# Altium PCB khoinguon.PcbDoc
Units mil, origin at the board's own origin, x right, y up, seen from the top; angles counter-clockwise.
Board outline 2640 x 1106.46 mil, 2 copper layers (Top Layer, Bottom Layer); 12 components, 6 nets, 29 pads, 0 vias.
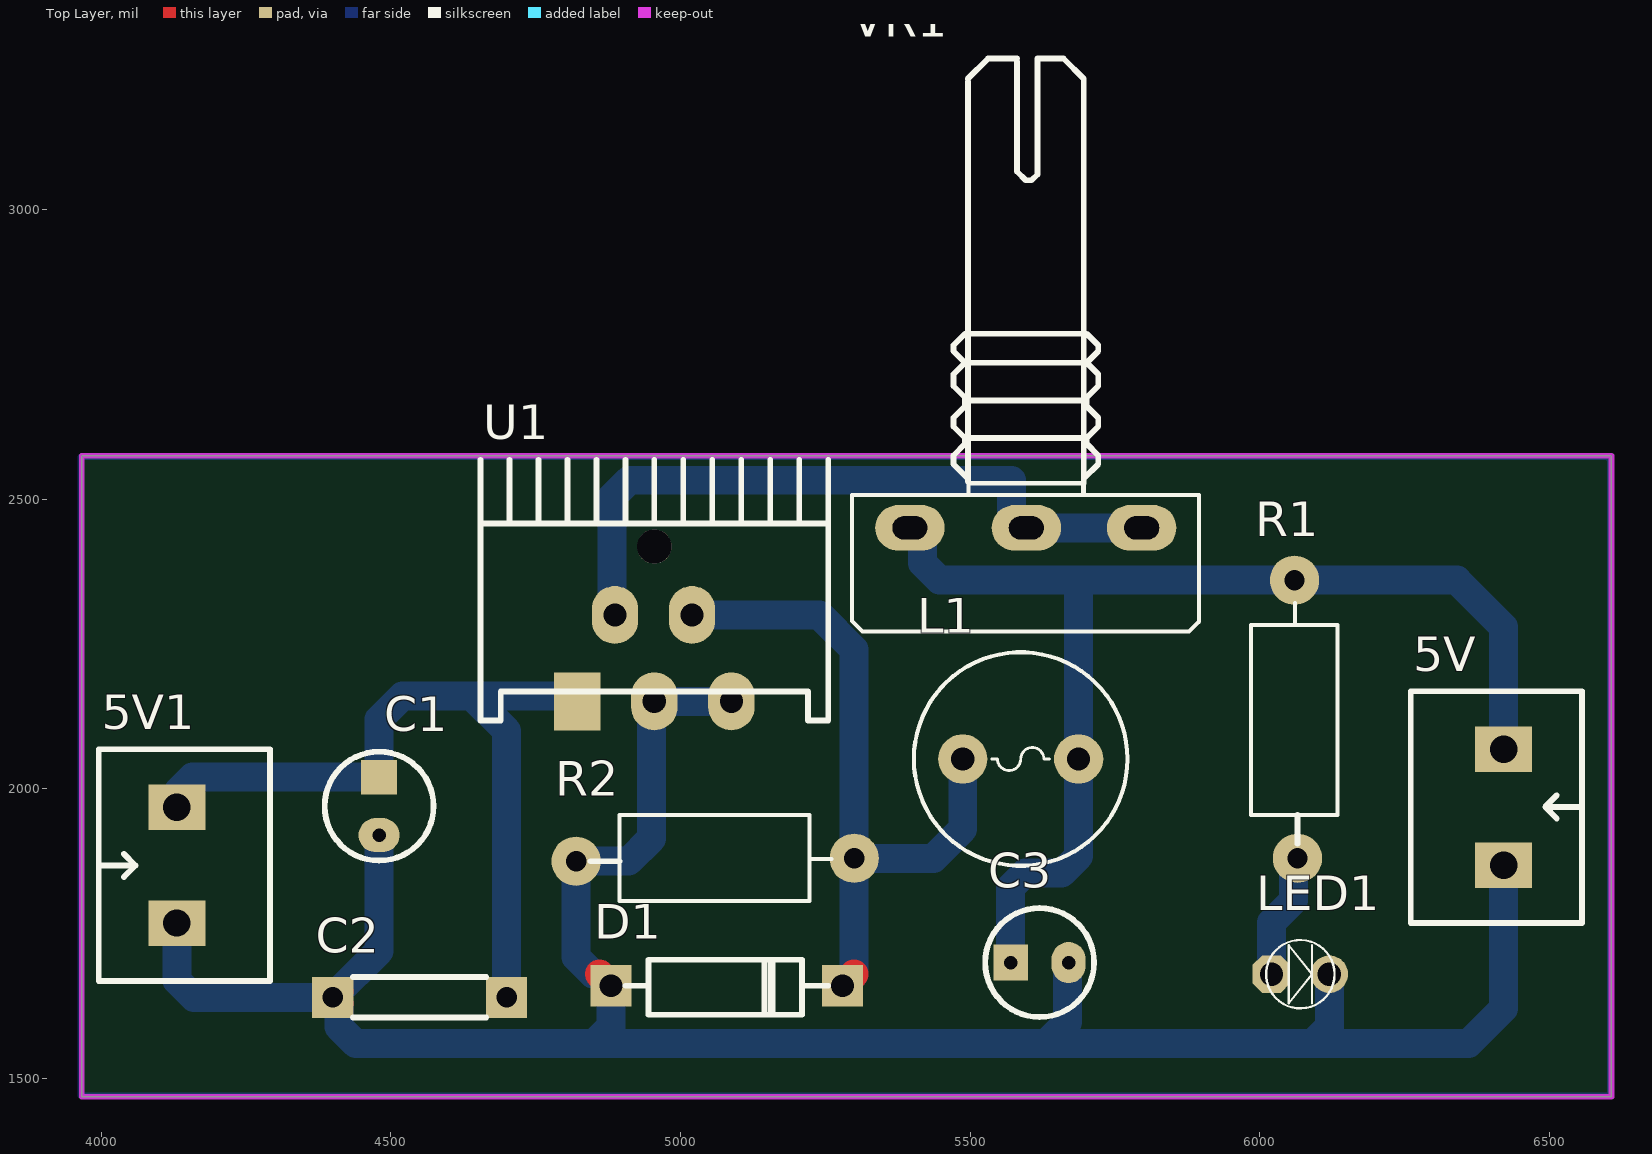
[diagram p0: Top Layer view]
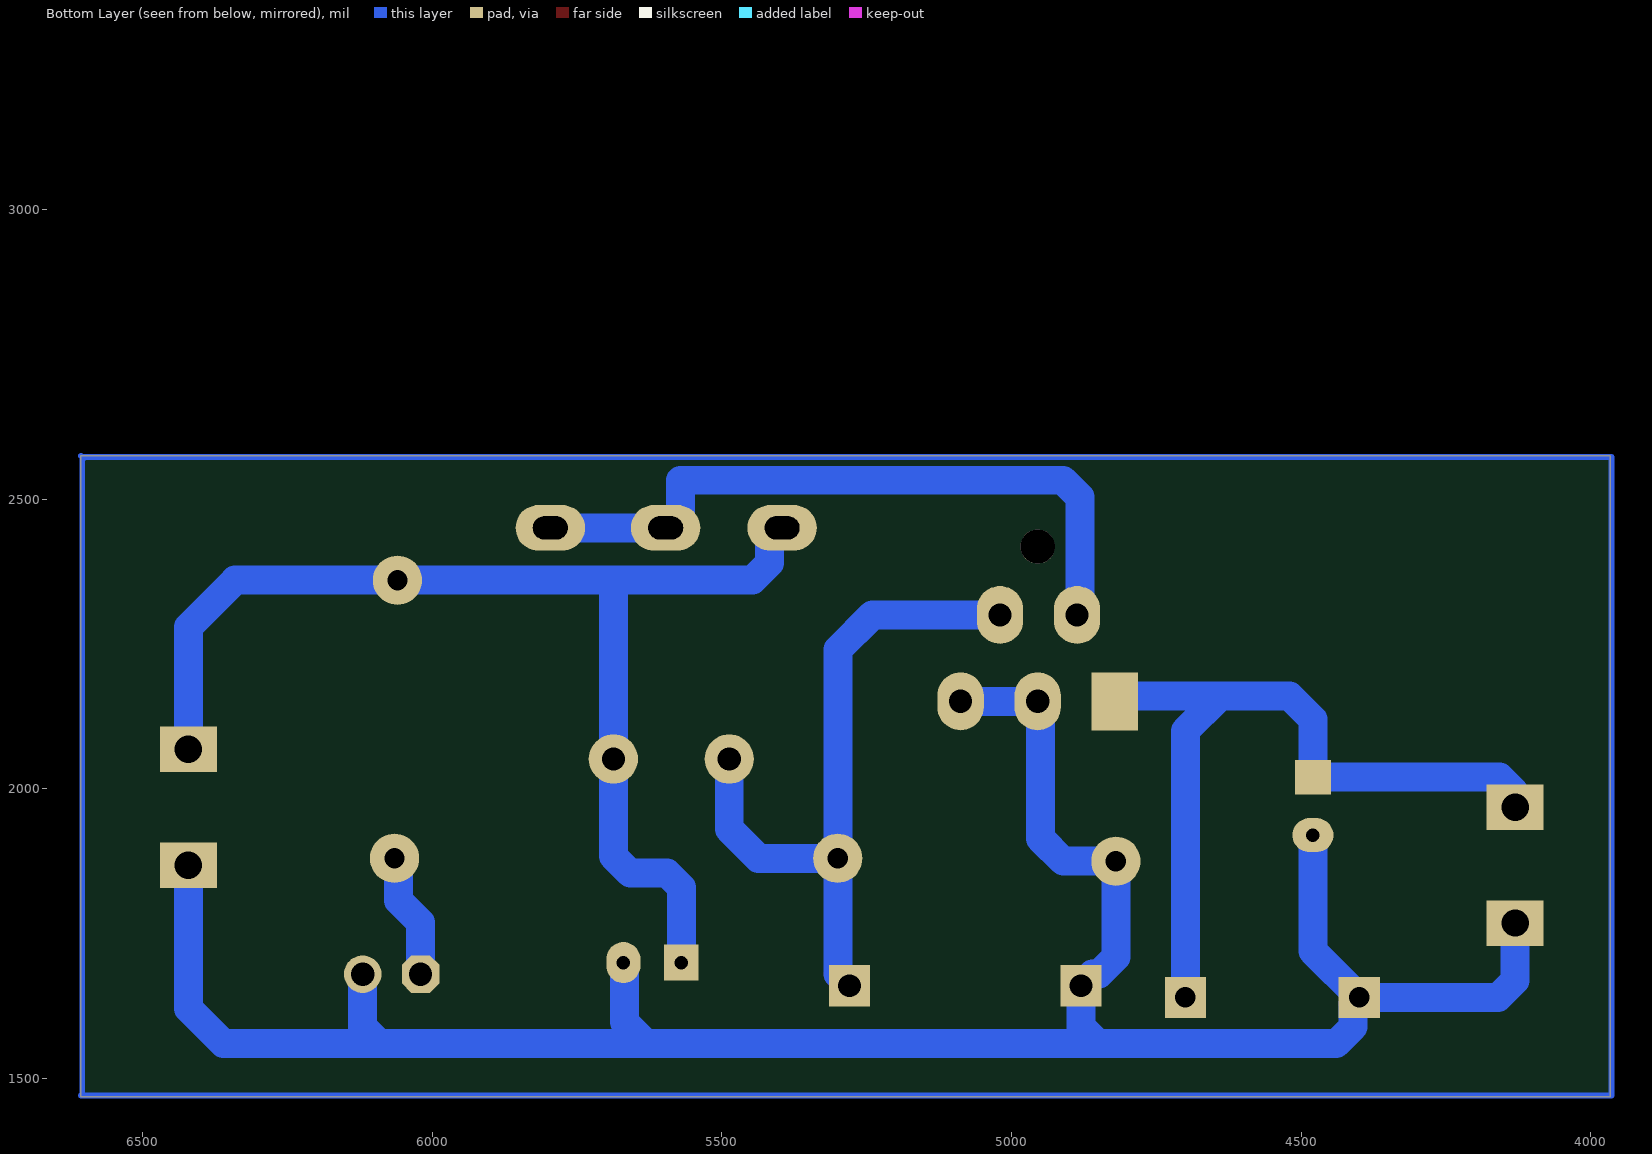
[diagram p1: Bottom Layer view, seen from below]
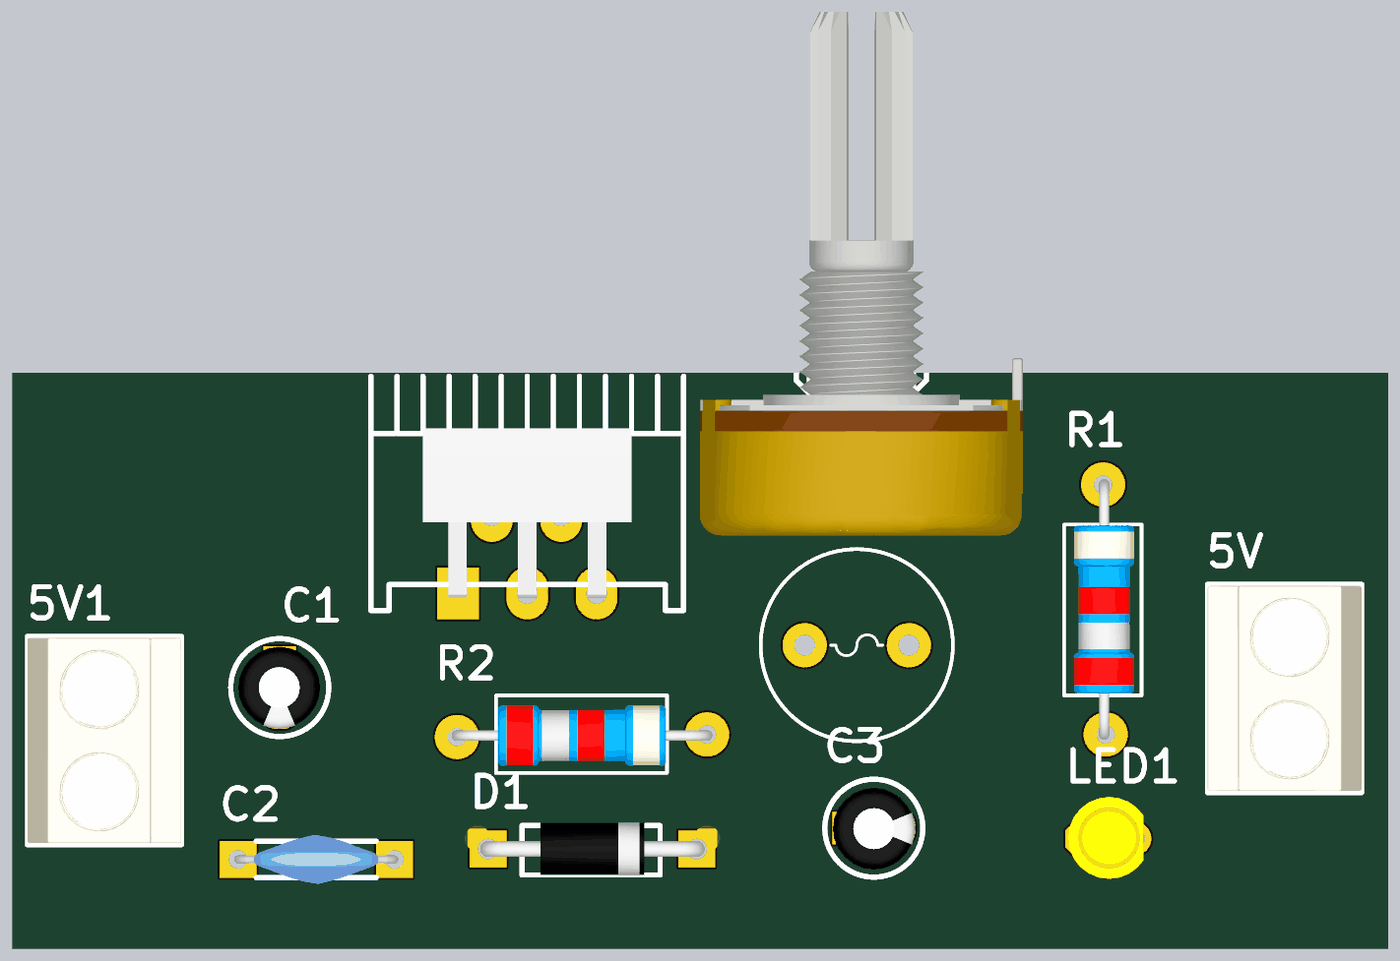
[diagram p2: 3D render of the assembled board from above, using the file's embedded part models]

## Layer stack, top to bottom
Top Solder: solder mask 0.4, Solder Resist, Dk 3.5
Top Layer: signal copper 1.4
Dielectric 1: dielectric 12.6, FR-4, Dk 4.8
Bottom Layer: signal copper 1.4
Bottom Solder: solder mask 0.4, Solder Resist, Dk 3.5

## Board outline
3966.92,1468.32 6606.92,1468.32 6606.92,2574.79 3966.92,2574.79

## Design rules (kind name [scope] priority, off if disabled: settings)
Clearance [All] p1: gap=10 ignorepadtopadclearanceinfootprint=FALSE
PolygonConnect [All] p1: connectstyle=Relief reliefconductorwidth=10 reliefentries=4 polygonreliefangle="90 Angle" airgapwidth=10
RoutingVias [All] p1: holewidth=28 width=50 viastyle="Through Hole" minholewidth=28 minwidth=50 maxholewidth=28 maxwidth=50
SolderMaskExpansion [All] p1: expansion=4 istentingtop=FALSE
Width [All] p1: maxlimit=50 minlimit=15 preferedwidth=20
30 further rules are at their usual default settings.

## Classes and differential pairs
component class khoinguon: C1 C2 C3 D1 L1 LED1 R1 R2 U1 VR1

## Components (designator, comment, footprint, x,y, rotation, side; value= is the part's Value field where it differs from the comment)
5V "Header 2 - M" "Medium - Header 2" 6420.99,1968.3 r270 top
5V1 "Header 2 - M" "Medium - Header 2" 4130.93,1868.23 r90 top (schematic designator 5V)
C1 "220u" CA-ALU-2.54#1 4480,1970 r270 top value=104
C2 "104" 103/2KV 4700,1640 r180 top
C3 "220u" CA-ALU-2.54#2 5620,1700 r0 top value=104
D1 "1N5428" DIODE/POW/1A 4880,1660 r0 top
L1 "100uH" L01 5587.33,2051.42 r0 top value="150 mH"
LED1 "LED" LED-3MM-YELLOW 6020,1680 r0 top value="LED 3 ly Single Colour"
R1 "330" RES-1/2W 6060,2100 r90 top
R2 "330" RES-1/2W 5040,1880 r0 top
U1 "LM2576" DIP5-T 4954,2318 r0 top
VR1 "10K" VR-S1 5596.12,2450.33 r180 top value="Volume 50k"

## Footprints (in the part's own frame and the unit in brackets; to place one, negate y for a bottom-side part, rotate by r counter-clockwise, add the part's x,y. Pads: shape width x height; smd on the part's side, far side on the other; paste and mask are expansions set on the pad)
103/2KV [mm]
  rect 1.8x1.8 hole 0.9: 1(0,0) 2(7.62,0)
  silkscreen extent 0.89,-0.89 6.73,0.89, body extent -0.19,-1.2 7.81,1.19, height 9.03
CA-ALU-2.54#1 [mm]
  rect 1.5x1.58 all layers, no hole: 1(-1.27,0)
  oval 1.5x1.8 hole 0.6: 2(1.27,0)
  silkscreen extent -2.39,-2.39 2.39,2.39, body extent -1.99,-2.03 2.01,1.97, height 7.01
CA-ALU-2.54#2 [mm]
  rect 1.5x1.58 hole 0.6: 1(-1.27,0)
  oval 1.5x1.8 hole 0.6: 2(1.27,0)
  silkscreen extent -2.39,-2.39 2.39,2.39, body extent -2,-2.03 1.99,1.97, height 7.01
DIODE/POW/1A [mm]
  rect 1.8x1.8 hole 1: 1(0,0) 2(10.16,0)
  silkscreen extent 0.64,-1.27 9.53,1.14, body extent -0.38,-1.28 10.54,1.28, height 2.55
DIP5-T [mil]
  rect 80x100 all layers, no hole: 1(-132,-167.09)
  oval 80x100 hole 40: 2(-67,-18) 3(1,-167) 4(66,-18) 5(134,-167)
  round 59.06 hole 59.06: ""(1,100)
  silkscreen extent -299,-200 301,250, body extent -199,-175 201,150, height 859
L01 [mil] "Inductor"
  round 85 hole 40: 1(-100,0) 2(100,0)
  silkscreen extent -184,-184 184,184
LED-3MM-YELLOW [mil]
  oct 65x65 hole 40: 1(0,0)
  round 65 hole 40: 2(100,0)
  silkscreen extent -9,-59 109,59, body extent -27,-77 117,80, height 181
"Medium - Header 2" [mm]
  rect 2x2.5 hole 1.2: 1(-2.54,0) 2(2.54,0)
  silkscreen extent -5.08,-4.08 5.08,3.43, body extent -5,-4.07 5,3.43, height 10
RES-1/2W [mil]
  round 85 hole 35: 1(-220,-5) 2(260,0)
  silkscreen extent -195,-74 221,75, body extent -230,-60 270,56, height 121
VR-S1 [mil]
  oval 120x78.74 hole 40 slot 60 at 0 deg: 1(-200,0) 2(-1,0) 3(200,0)
  silkscreen extent -299,-810 300,179, body extent -310,-818 310,188, height 839

## Part data
5V 5V1: "Header, 2-Pin, Medium", LatestRevisionDate=17-Jul-2002, LatestRevisionNote="Re-released for DXP Platform.", Publisher="Altium Limited"
C1 C3: library part CN-ALU-DIP, "Capacitor (Semiconductor SIM Model)", LatestRevisionDate=17-Jul-2002, LatestRevisionNote="Re-released for DXP Platform.", PackageReference=C1206, Publisher="Altium Limited"
C2: library part Cap2KV, LatestRevisionDate=17-Jul-2002, LatestRevisionNote="Re-released for DXP Platform.", PackageReference=RAD-0.3, Published=8-Jun-2000, Publisher="Altium Limited"
D1: library part "Diode Power", "Diode Power", PackageDocument=Aug-1999, ComponentLink1Description="Manufacturer Link", ComponentLink1URL=http://www.fairchildsemi.com/, ComponentLink2Description=Datasheet, ComponentLink2URL=http://www.fairchildsemi.com/ds/1N%2F1N5400.pdf, DatasheetDocument=1998, LatestRevisionDate=17-Jul-2002, LatestRevisionNote="Re-released for DXP Platform.", PackageReference=DO-201AD, Published=8-Jun-2000, Publisher="Altium Limited"
L1: library part L1, "Inductor"
LED1: "LED Single colour Green and Red"
R1 R2: library part Res, "Res", Manufacturer="Generic Components", Class=Passive, Published=08/06/2000, Publisher="Altium Hobart Technology Centre", SubClass=R
U1: Max Input Voltage="12 V", Max Output Current="3 (6.0 peak) A", Max Output Voltage=mV, Temperature Range="-40 to +125 degC", Category=IC-Power, Min Input Voltage=mV, Min Output Voltage=mV, Mounting Technology="Surface Mount", Status=Unreleased, Supply Voltage=mV
VR1: library part VR-S, "Var Resistor"

## Nets (pads, with @x,y where several pads share a name; then routed paths per layer and width w, separated by ;. In a path a pad name is that pad's centre, name@x,y a point inside that pad or via, vN(x,y) a via of type N, cw(c..) or ccw(c..) an arc to the next point about the centre after c; other vN are vias at no path point)
Net5V_1: 5V.1 C3.1 L1.2 R1.2 VR1.3 | length 2083.4
  Bottom Layer w50: VR1.3 5404.94,2450.33 5418.22,2437.05 5418.22,2389.29 5447.51,2360 5680,2360 ; C3.1 5570,1830 5594.46,1854.46 5658.04,1854.46 5687.33,1883.74 L1.2 5687.33,2352.67 5680,2360 ; 5V.1 6420.99,2279.01 6340,2360 R1.2 5680,2360
Net5V_2: 5V1.1 5V.2 C1.2 C2.2 C3.2 D1.1 LED1.2 R2.1 U1.3 U1.5 | length 4247.8
  Top Layer w20: C1.2@4474.09,1920 C1.2
  Top Layer w50: C2.2@4395.63,1635.63 C2.2 ; C2.2@4410.43,1629.57 C2.2 ; C2.2@4410.43,1650.43 C2.2 ; D1.1@4860,1680 D1.1 ; C3.2@5668.27,1698.27 C3.2
  Bottom Layer w50: 5V1.1 4130.93,1669.29 4160.22,1640 C2.2 ; C1.2 4480,1720 C2.2 ; D1.1@4860,1680 4849.29,1680 4820,1709.29 R2.1 4910.71,1875 4950,1914.29 4950,2151 U1.5@5083,2151 ; D1.1 4880,1589.29 4850.71,1560 ; C3.2@5668.27,1698.27 5668.27,1597.56 5630.71,1560 ; LED1.2 6120,1589.29 6090.71,1560 ; 5V.2 6420.99,1620.99 6360,1560 6090.71,1560 ; C2.2 4410.43,1629.57 4410.43,1589.29 4439.72,1560 4850.71,1560 ; 4850.71,1560 5630.71,1560 ; 5630.71,1560 6090.71,1560
Net12V_2: 5V1.2 C1.1 C2.1 U1.1 | length 1374.5
  Bottom Layer w50: 5V1.2 4134.42,1971.72 4134.42,1996.8 4157.62,2020 C1.1 4480,2120 4520,2160 4640,2160 ; C2.1 4700,2100 4640,2160 ; U1.1@4807.91,2160 4640,2160
NetD1_2: D1.2 L1.1 R2.2 U1.4 | length 1227.3
  Top Layer w50: D1.2 D1.2@5300,1680
  Bottom Layer w50: U1.4@5015,2300 5240,2300 5300,2240 R2.2 ; D1.2@5300,1680 R2.2 ; L1.1 5487.33,1930.56 5436.77,1880 R2.2
NetLED1_1: LED1.1 R1.1 | length 218.6
  Bottom Layer w50: LED1.1 6020,1769.04 6058.3,1807.34 6058.3,1873.3 R1.1
NetU1_2: U1.2 VR1.1 VR1.2 | length 1203.8
  Bottom Layer w50: U1.2@4882,2300 4882,2503.19 4911.29,2532.48 5571.45,2532.48 5571.45,2463.6 5584.72,2450.33 VR1.2 VR1.1
pads on no net: U1.
copper on no net: | length 7488.6
  Bottom Layer w10: 3964.69,2572.48 3964.69,1470.63 6606.37,1470.63 6604.06,1472.93 6604.06,2567.87 6599.45,2572.48 ; 3966.99,2572.48 6604.06,2572.48 6606.37,2574.79

## Keep-outs
Top Layer:
  the board outline again, w10